# Altium PCB steering_controller.PcbDoc
Units mm, origin at the board's own origin, x right, y up, seen from the top; angles counter-clockwise.
Board outline 72.39 x 47.88 mm, 2 copper layers (Top Layer, Bottom Layer); 14 components, 27 nets, 72 pads, 3 vias.
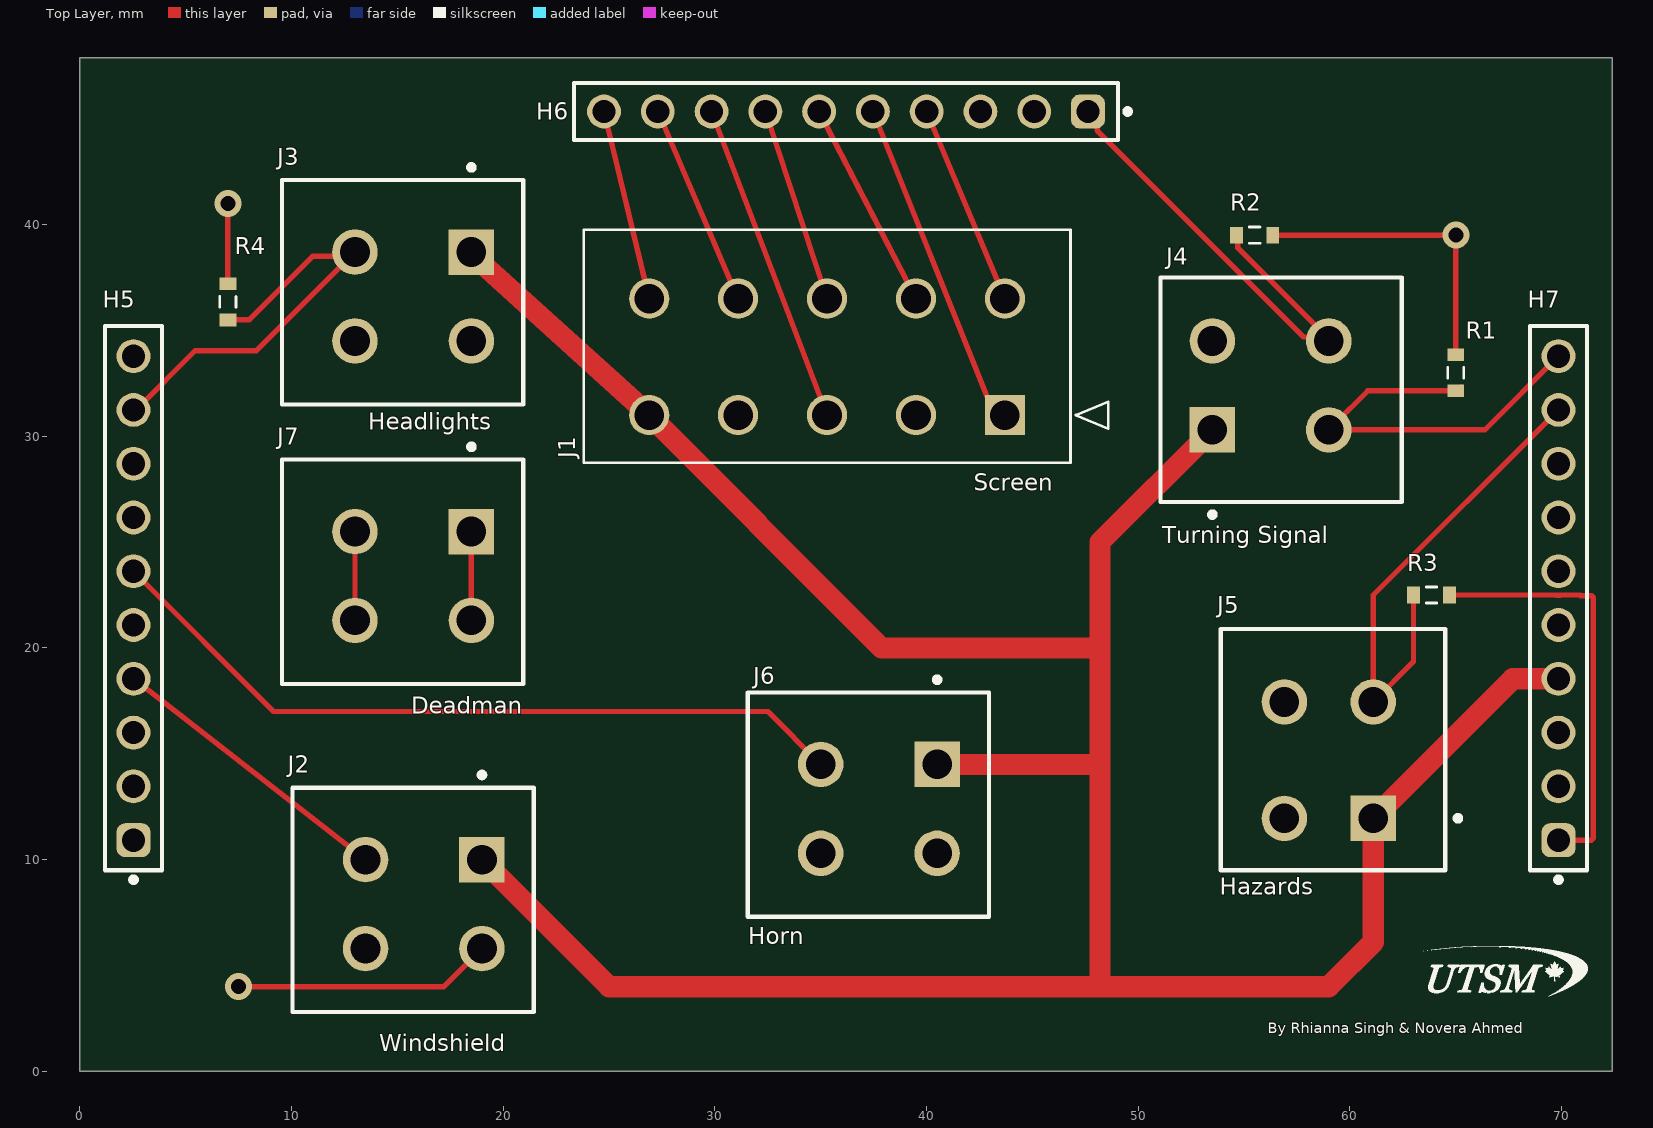
[diagram p0: Top Layer view]
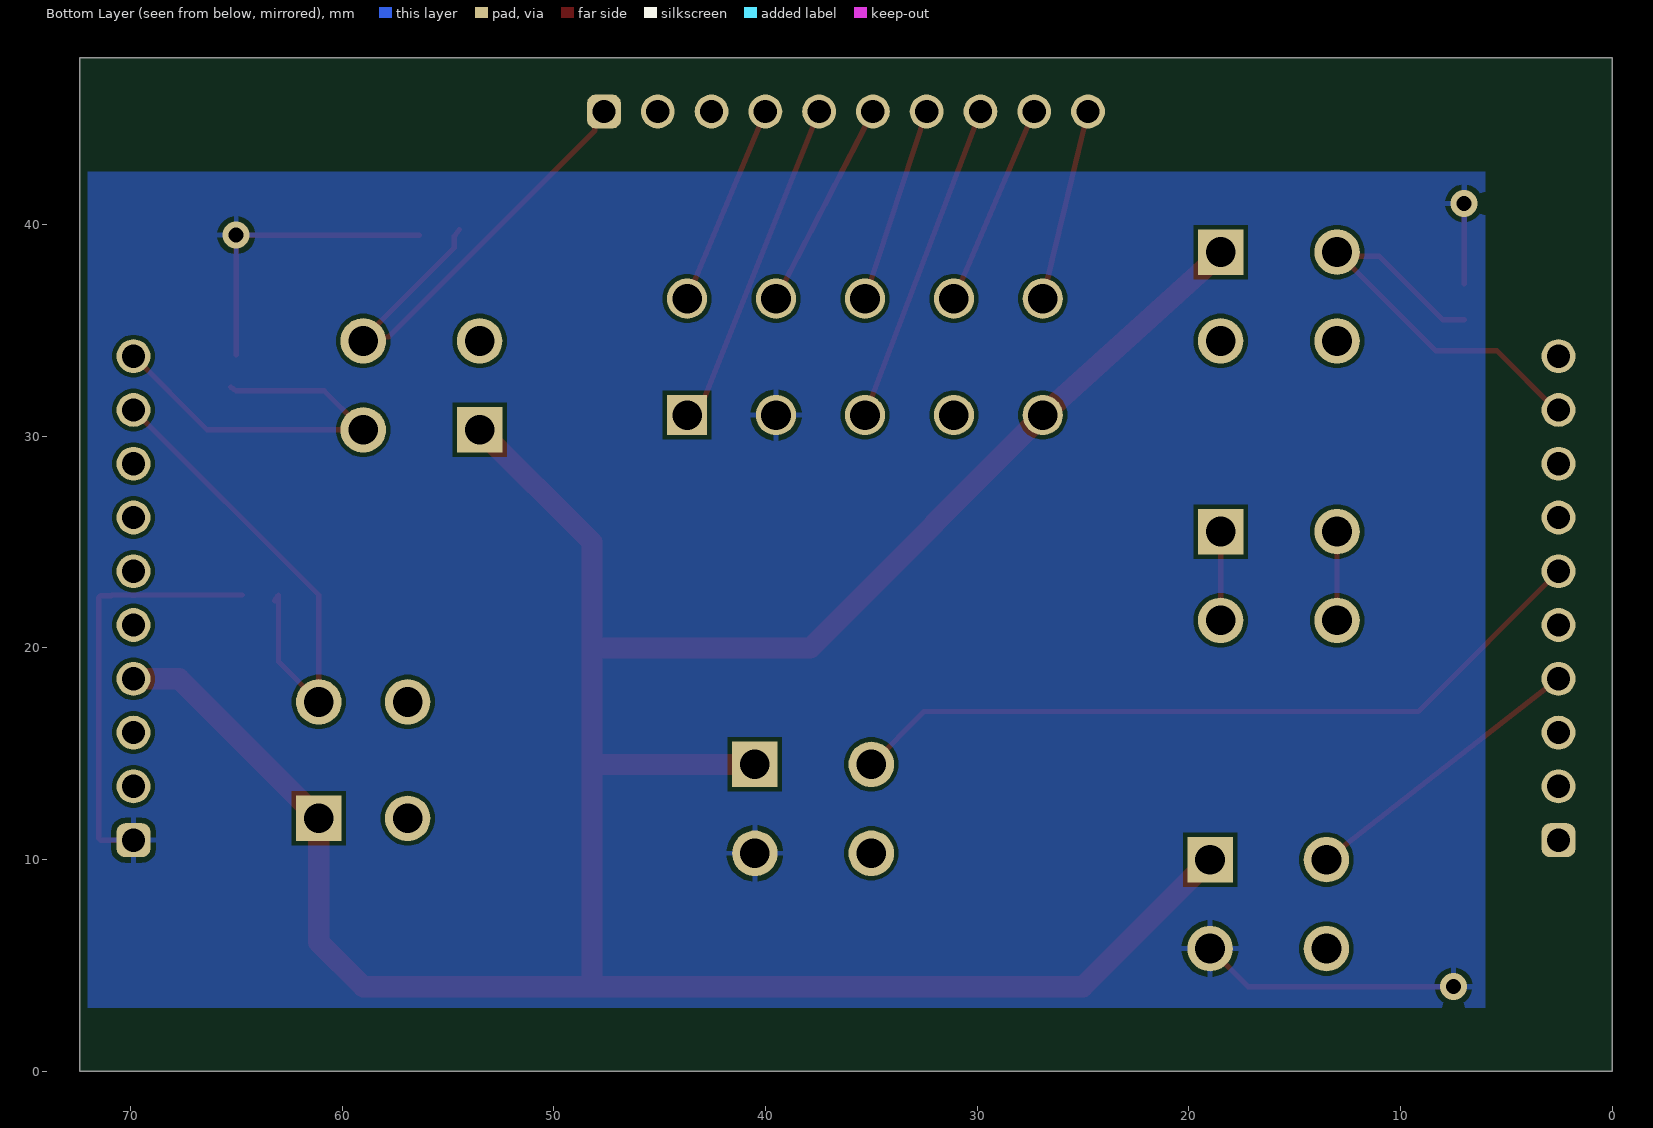
[diagram p1: Bottom Layer view, seen from below]
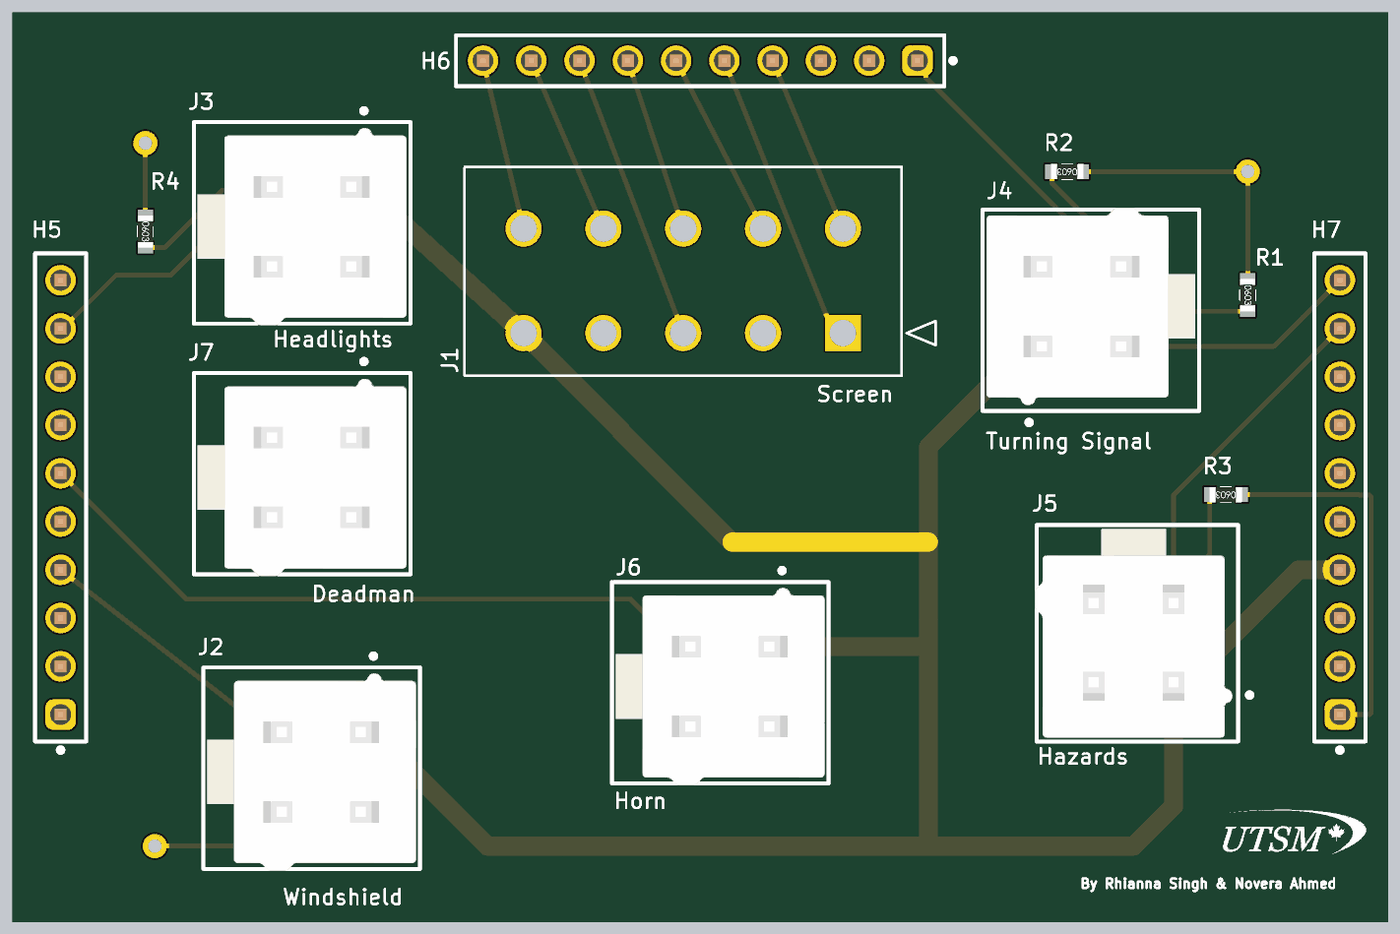
[diagram p2: 3D render of the assembled board from above, using the file's embedded part models]

## Layer stack, top to bottom
Top Solder: solder mask 0.0102, Solder Resist, Dk 3.5
Top Layer: signal copper 0.0356
Dielectric 1: dielectric 0.32, FR-4, Dk 4.8
Bottom Layer: signal copper 0.0356
Bottom Solder: solder mask 0.0102, Solder Resist, Dk 3.5

## Board outline
0,0 72.39,0 72.39,47.879 0,47.879

## Design rules (kind name [scope] priority, off if disabled: settings)
BoardOutlineClearance [All] p1: gap=0.3 ignorepadtopadclearanceinfootprint=FALSE except(0.4: Arc-SplitBarrior Arc-SplitContinuation Track-SplitBarrior Track-SplitContinuation SMDPad-SplitBarrior SMDPad-SplitContinuation THPad-SplitBarrior THPad-SplitContinuation Via-SplitBarrior Via-SplitContinuation Fill-SplitBarrior Fill-SplitContinuation Poly-SplitBarrior Poly-SplitContinuation Region-SplitBarrior Region-SplitContinuation Text-SplitBarrior Text-SplitContinuation)
Clearance "Clearance Different Nets" [All] p1: gap=0.2 ignorepadtopadclearanceinfootprint=FALSE except(0.089: Arc-Arc Arc-Track Arc-SMDPad Track-Track Track-SMDPad; 0.127: SMDPad-SMDPad SMDPad-Via THPad-Via Via-Via; 0.254: Arc-Via Arc-Text Track-Via Track-Text SMDPad-Text THPad-Text Via-Text Fill-Text Poly-Text Region-Text Text-Text; 0.5: THPad-THPad Via-Hole)
Clearance "Clearance Same Nets" [All] p2: gap=0.2 ignorepadtopadclearanceinfootprint=FALSE except(0.089: Arc-Arc Arc-Track Arc-SMDPad Track-Track Track-SMDPad SMDPad-SMDPad; 0.127: SMDPad-Via THPad-Via; 0.254: Arc-Via Arc-Text Track-Via Track-Text SMDPad-Text THPad-Text Via-Via Via-Text Fill-Text Poly-Text Region-Text Text-Text)
Clearance "Clearance Bottom Layer" [OnLayer('Bottom Layer')] p3: gap=0.203 ignorepadtopadclearanceinfootprint=TRUE except(0.254: Arc-Text Track-Text SMDPad-Text THPad-Text Via-Text Fill-Text Poly-Text Region-Text Text-Text)
Clearance "Clearance Top Layer" [OnLayer('Top Layer')] p4: gap=0.203 ignorepadtopadclearanceinfootprint=TRUE except(0.254: Arc-Text Track-Text SMDPad-Text THPad-Text Via-Text Fill-Text Poly-Text Region-Text Text-Text)
HoleSize [All] p1: absolutevalues=TRUE maxlimit=6.3 minlimit=0.2 maxpercent=80.000 minpercent=20.000
MinimumAnnularRing [All] p1: minimumring=0.13
MinimumSolderMaskSliver [All] p1: minsoldermaskwidth=0.1
PolygonConnect [All] p1: connectstyle=Relief reliefconductorwidth=0.254 reliefentries=4 polygonreliefangle="90 Angle" airgapwidth=0.254
RoutingCorners [All] p1: cornerstyle=Round minsetback=2.54 maxsetback=2.54
RoutingVias [All] p1: holewidth=0.711 width=1.27 viastyle="Through Hole" minholewidth=0.711 minwidth=1.27 maxholewidth=0.711 maxwidth=1.27
SilkToSilkClearance [All] p1: silktosilkclearance=0.1
SilkToSolderMaskClearance [IsPad] p1: minsilkscreentomaskgap=0.1 clearancetoexposedcopper=TRUE
SolderMaskExpansion [All] p1: expansion=0.102 istentingtop=FALSE
Width [All] p1: maxlimit=0.254 minlimit=0.254 preferedwidth=0.254
25 further rules are at their usual default settings.

## Classes and differential pairs
component class I/O: hdhhd J1 J2 J3 J4 J5 J6 J7 R1 R2 R3 R4
component class steering_controller: H5 H6 H7

## Components (designator, comment, footprint, x,y, rotation, side; value= is the part's Value field where it differs from the comment)
H5 "61301011121" 61301011121 2.54,22.352 r90 top
H6 "61301011121" 61301011121 36.195,45.339 r180 top
H7 "61301011121" 61301011121 69.85,22.352 r90 top
J1 "39281103" CON_39281103 43.7,31 r180 top
J2 "Windshield" FP-0039281043-MFG 16.45,7.9 r270 top
J3 "Headlight" FP-0039281043-MFG 15.95,36.6 r270 top
J4 "Turning Signal" FP-0039281043-MFG 56.05,32.4 r90 top
J5 "Hazard" FP-0039281043-MFG 59,14.5 r180 top
J6 "Horn" FP-0039281043-MFG 37.95,12.4 r270 top
J7 "Deadman" FP-0039281043-MFG 15.95,23.4 r270 top
R1 "4.7k" 0603r 65,33 r270 top value=4.7K
R2 "4.7k" 0603r 55.5,39.5 r180 top value=4.7K
R3 "" 0603r 63.851,22.5 r180 top value=4.7K
R4 "4.7k" 0603r 7,36.351 r270 top value=4.7K

## Footprints (in the part's own frame and the unit in brackets; to place one, negate y for a bottom-side part, rotate by r counter-clockwise, add the part's x,y. Pads: shape width x height; smd on the part's side, far side on the other; paste and mask are expansions set on the pad)
0603r [mil]
  rect 24x31 smd: 1(-33.5,0) 2(33.5,0)
  silkscreen extent -10,-15 10,15, body extent -33,-16 33,16, height 22
61301011121 [mm] "Pin Header, pitch 2.54 mm, THT, Vertical, single row, 10p"
  rrect50% 1.6x1.6 hole 1.1: 1(-11.43,0)
  round 1.6 hole 1.1: 2(-8.89,0) 3(-6.35,0) 4(-3.81,0) 5(-1.27,0) 6(1.27,0) 7(3.81,0) 8(6.35,0) 9(8.89,0) 10(11.43,0)
  silkscreen extent -13.42,-1.35 12.85,1.35, body extent -12.7,-1.27 12.7,1.27, height 8.57
CON_39281103 [mm]
  rect 1.9x1.9 / inner round 1.524 / far side rect 1.9x1.9 hole 1.4 paste-2539.97 mask+0.076: 1(0,0)
  round 1.9 / inner round 1.524 / far side round 1.9 hole 1.4 paste-2539.97 mask+0.076: 2(4.2,0) 3(8.4,0) 4(12.6,0) 5(16.8,0) 6(0,-5.5) 7(4.2,-5.5) 8(8.4,-5.5) 9(12.6,-5.5) 10(16.8,-5.5)
  silkscreen extent -4.88,-8.75 19.9,2.25
FP-0039281043-MFG [mm]
  rect 2.15x2.15 hole 1.4 paste-2539.97 mask+0: 1(-2.1,2.55)
  round 2.15 hole 1.4 paste-2539.97 mask+0: 2(2.1,2.55) 3(-2.1,-2.95) 4(2.1,-2.95)
  silkscreen extent -6.22,-6.4 5.1,5, body extent -5.6,-6.5 5.8,5.1, height 0.25

## Part data
H5 H6 H7: "WR-PHD Pin Header, THT, Vertical, pitch 2.54mm, 1 Row, 10P", Contact Resistance=20mOhm, Manufacturer="Wurth Elektronik", Operating Temperature Max=105°C, Operating Temperature Min=-40°C, Rated Current=3A, Withstanding Voltage=500V, Working Voltage=250V, Category="Board-to-Board Connectors", ComponentLink1Description="Website Link", ComponentLink1URL=https://www.we-online.com/redexpert/article/61301011121?ad, ComponentLink2Description="Datasheet Link", ComponentLink2URL=https://www.we-online.com/redexpert/spec/61301011121?ad, Gender="Pin Header", Manufacturer Part Number=61301011121, Match Code=WR-PHD, Mount="Through Hole", Number of Pins=10, Number of Rows=1, Orientation=Vertical, Packaging=Bag, Pitch=2.54mm
J1: "No Description Available", Mfr_Name="Molex Connector Corporation", RefDes=RefDes, Type=Type
J2 J3 J4 J5 J6 J7: library part 1x4_FEMALE_POWER, "CONN HEADER VERT 4POS 4.2MM. 0039281043", Current Rating=9A, Manufacturer=Molex, Manufacturer Part Number=0039281043, Package=0, Temperature="-40°C to +105°C", Temperature Range High=+105°C, Temperature Range Low=-40°C, Voltage Rating=600V, Automotive=No, Category=Conn, ComponentLink2Description=Datasheet, ComponentLink2URL=https://www.molex.com/webdocs/datasheets/pdf/en-us/0039281043_PCB_HEADERS.pdf, Conn Gender=Male, Conn Orientation=Vertical, Contact Material=Tin, Device Class L1=Connectors, Device Class L2="Headers and Wire Housings", Device Class L3=unset, Digikey Description="CONN HEADER VERT 4POS 4.2MM", Footprint Url=https://www.molex.com/pdm_docs/sd/039281043_sd.pdf, Height=13.1mm, Lead Free=Yes, Number Of Contacts=4, Number of Rows=2, Octopart=https://octopart.com/39-28-1043-molex-7613, Pitch=4.2mm, RoHS=TRUE
R1 R2 R3 R4: library part Res3, "SMD Resistor", LatestRevisionDate=29-May-2009, LatestRevisionNote="IPC-7351 Footprint Added.", PackageDescription="Chip Resistor", PackageReference=J1-0603, Published=8-Jun-2000, Publisher="Altium Limited"

## Via types
v1: diameter 1.27, hole 0.711, Top Layer to Bottom Layer, 3 vias

## Nets (pads, with @x,y where several pads share a name; then routed paths per layer and width w, separated by ;. In a path a pad name is that pad's centre, name@x,y a point inside that pad or via, vN(x,y) a via of type N, cw(c..) or ccw(c..) an arc to the next point about the centre after c; other vN are vias at no path point)
5V: H7.4 J1.5 J2.1 J3.1 J4.1 J5.1 J6.1 | length 136.2
  Top Layer w1: J3.1@18.505,38.607 19.036,38.125 J1.5 32.009,25.891 32.009,25.862 37.871,20 48.2,20 ; J2.1 25,4 48.2,4 ; J6.1 48.2,14.5 ; J4.1 48.2,25 48.2,20 ; H7.4 67.692,18.542 J5.1 61.1,6.1 59,4 48.2,4 ; 48.2,4 48.2,14.5 ; 48.2,14.5 48.2,20
+7V: H7.3
+12V: H7.2
A0: H5.9 J3.3 R4.2 | length 20.6
  Top Layer w0.254: H5.9 2.653,31.242 5.456,34.044 8.344,34.044 J3.3@12.8,38.5 ; R4.2 8,35.5 11,38.5 J3.3@12.8,38.5 ; J3.3 J3.3@12.8,38.5
A1: H5.8
A2: H5.7
A3: H5.6 J6.3 | length 36.2
  Top Layer w0.254: H5.6 9.162,17 32.5,17 J6.3
A4: H5.5
A5: H5.4 J2.3 | length 13.9
  Top Layer w0.254: H5.4 J2.3
A6: H5.3
A7: H5.2
AREF: H5.1
D0/RX: H7.10 J4.3 R1.2 | length 19.4
  Top Layer w0.254: R1.2@65.267,32.327 R1.2 60.849,32.149 59.2,30.5 J4.3 66.368,30.3 H7.10
D1/TX: H7.9 J5.3 R3.2 | length 23.5
  Top Layer w0.254: R3.2 63,19.35 J5.3 61.1,22.492 H7.9 ; R3.2@63.024,22.464 R3.2@63.178,22.233
D3: H6.1 J4.4 R2.2 | length 23
  Top Layer w0.254: H6.1 48.057,44.907 48.057,44.443 57.81,34.69 J4.4@58.81,34.69 ; R2.2@54.471,39.767 R2.2 54.706,39.443 54.706,38.89 58.858,34.739 59,34.597 J4.4
D4: H6.2
D5: H6.3
D6: H6.4 J1.6 | length 9.6
  Top Layer w0.254: H6.4 J1.6
D7: H6.5 J1.1 | length 15.7
  Top Layer w0.254: H6.5 42.877,31.823 J1.1
D8: H6.6 J1.7 | length 10
  Top Layer w0.254: H6.6 J1.7
D9/CS1: H6.7 J1.8 | length 9.3
  Top Layer w0.254: H6.7 J1.8
D11/MOSI: H6.8 J1.3 | length 15.3
  Top Layer w0.254: H6.8 J1.3
D12/MISO: H6.9 J1.9 | length 9.6
  Top Layer w0.254: H6.9 J1.9
D13/SCK: H6.10 J1.10 | length 9.1
  Top Layer w0.254: H6.10 J1.10
Deadman_In: J7.1 J7.2 | length 4.2
  Top Layer w0.254: J7.2 J7.1
Deadman_Out: J7.3 J7.4 | length 4.2
  Top Layer w0.254: J7.4 J7.3
GND: H7.1 J1.2 J2.2 J6.2 R1.1 R2.1 R3.1 R4.1 | length 50.2
  Top Layer w0.254: R4.1 v1(7,41) ; v1(7.5,4) 17.2,4 J2.2 ; R2.1 v1(65,39.5) R1.1 ; R3.1 69.736,22.5 69.776,22.497 ccw(c69.85,23.622) 69.923,22.497 69.964,22.5 70.84,22.5 70.88,22.5 70.907,22.473 71.4,22.473 71.5,22.373 71.5,11.022 71.4,10.922 H7.1
pads on no net: H5.10 H7.5 H7.6 H7.7 H7.8 J1.4 J2.4 J3.2 J3.4 J4.2 J5.2 J5.4 J6.4

## Polygon pours and split planes (outlines as drawn)
GND on Bottom Layer "GND_L02_P000" (solid, pour order 0): 6,3 6,42.5 72,42.5 72,3

## Silkscreen, mask and mechanical layers (free items; w line width, h text height)
Top Overlay:
  drawing of 22 lines, arcs and shapes, not listed
  text "Headlights" at 13.625,30.299 h0.8
  text "Screen" at 42.236,27.415 h0.8
  text "Turning Signal" at 51.143,24.937 h0.8
  text "Deadman" at 15.67,16.892 h0.8
  text "Hazards" at 53.846,8.34 h0.8
  text "Horn" at 31.567,5.998 h0.8
  text "By Rhianna Singh & Novera Ahmed" at 56.125,1.792 h0.5
  text "Windshield" at 14.149,0.939 h0.8
Mechanical 1:
  the board outline again, w0.254